# EAGLE board InstantPizza (EAGLE 6.5.0)
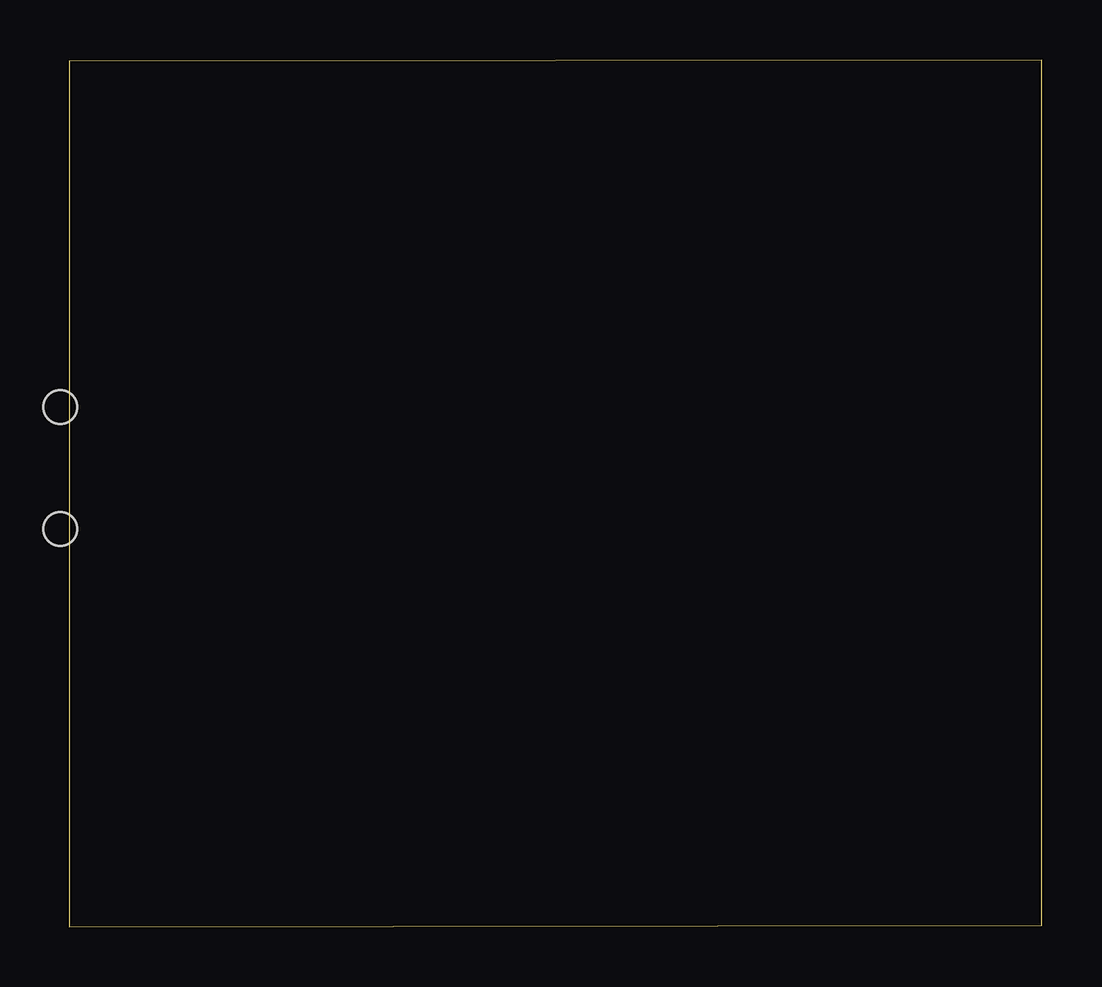
[diagram p0: board, top side]
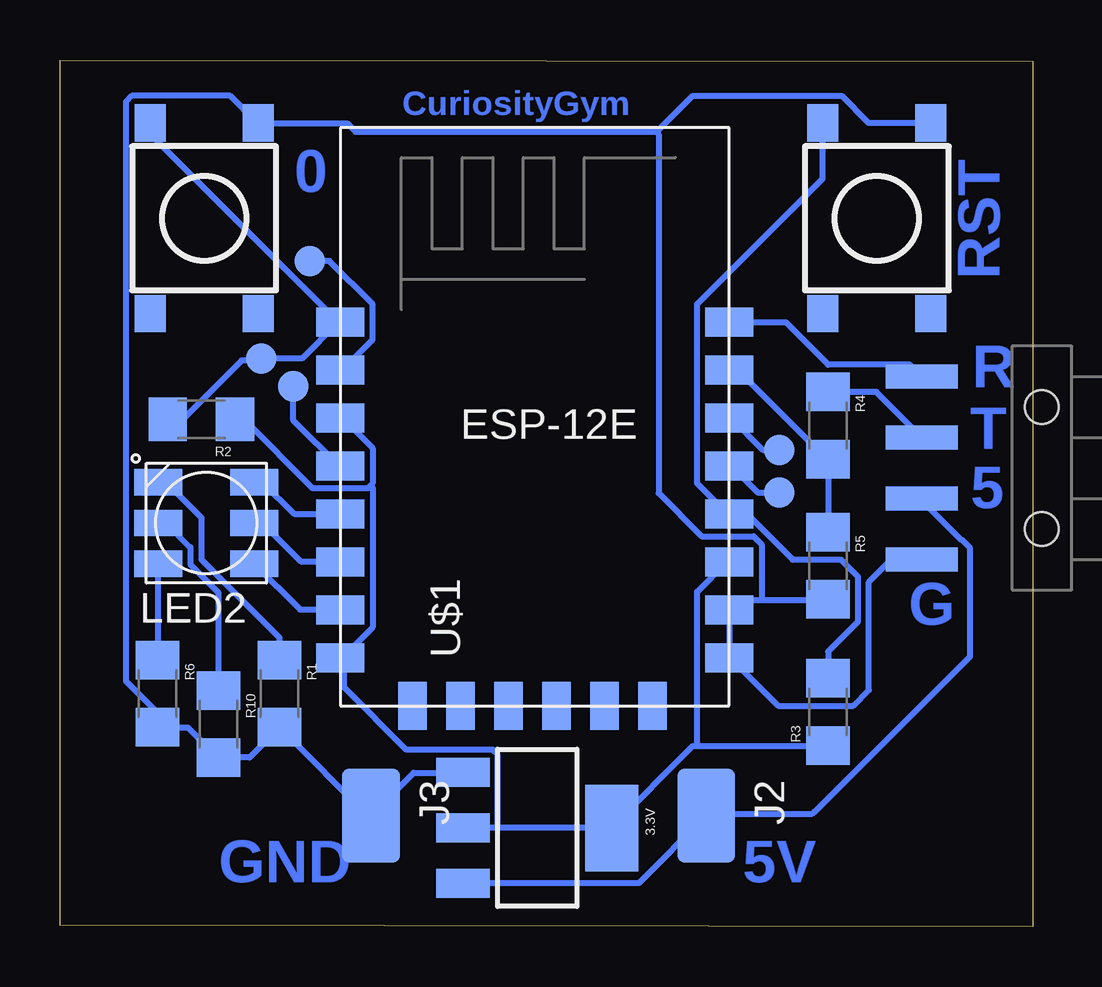
[diagram p1: board, bottom side, seen from below]

Size 40.53 x 36.13 mm. Coordinates in mm from the lower left corner, seen from the top.
Outline: 0,0 40.53,0.06 40.53,36.13 0,36.07 0,0
Copper layers (1*16): Top 0.035mm / dielectric 1.5mm / Bottom 0.035mm
Design rules "default *": minimum track width 10mil, minimum drill 24mil, track to track 8mil, track to pad 8mil, pad to pad 8mil, via to via 8mil, smd to smd 8mil, copper to edge 40mil, drill to drill 8mil, minimum pad ring 10mil, minimum via ring 8mil, stop-mask expansion 4mil, vias tented up to drill 0mil, thermal gap 10mil

## Footprints (pad centres in the part's own frame; a part is rotated, then mirrored left to right if it is on the bottom)
SOT223 = smd 1.219 x 2.235: 1 -2.311,-3.099; 2 0,-3.099; 3 2.311,-3.099 | smd 3.6 x 2.2: 4 0,3.099
1X04-SMD = smd 1 x 3: 1 -3.81,5; 2 -1.27,5; 3 1.27,5; 4 3.81,5 | hole 1.4: -2.54,0; 2.54,0
LUXEON-PAD = smd 3.9 x 2.4: P$1 0,0
RGBLED5050 = smd 2 x 1.1: 1 -2,1.7; 2 -2,0; 3 -2,-1.7; 4 2,-1.7; 5 2,0; 6 2,1.7
1206 = smd 1.6 x 1.8: 1 -1.4,0; 2 1.4,0
TACTILE_SWITCH_TALL = smd 1.55 x 1.3: A1 -3.975,-2.25; A2 3.975,-2.25; B1 -3.975,2.25; B2 3.975,2.25
PAD.03X.05 = smd 1.27 x 1.27: P$1 0,0
ESP8266-ESP12E = smd 2 x 1.2: 1 0,16; 2 0,14; 3 0,12; 4 0,10; 5 0,8; 6 0,6; 7 0,4; 8 0,2; 9 16.2,2; 10 16.2,4; 11 16.2,6; 12 16.2,8; 13 16.2,10; 14 16.2,12; 15 16.2,14; 16 16.2,16 | smd 1.2 x 2: 17 11,0; 18 3,0; 19 5,0; 20 13,0; 21 7,0; 22 9,0

## Placement (x,y rotation side)
3.3V  [SOT223]  20.64,4.11 270 bottom
J1  [1X04-SMD]  -0.39,19.11 90 bottom
J2  [LUXEON-PAD]  13.6,4.63 270 bottom
J3  [LUXEON-PAD]  27.57,4.63 270 bottom
LED2  RGBLED5050  [RGBLED5050]  34.43,16.82 180 bottom
R1  10k  [1206]  31.38,9.71 270 bottom
R2  10k  [1206]  34.64,21.15 180 bottom
R3  10k  [1206]  8.52,8.95 90 bottom
R4  10k  [1206]  8.52,20.89 270 bottom
R5  20k  [1206]  8.52,15.05 270 bottom
R6  10k  [1206]  36.46,9.71 270 bottom
R10  10k  [1206]  33.92,8.44 270 bottom
S1  SWITCH-MOMENTARY-2SMD-4  [TACTILE_SWITCH_TALL]  34.52,29.52 90 bottom
S2  SWITCH-MOMENTARY-2SMD-4  [TACTILE_SWITCH_TALL]  6.49,29.52 90 bottom
TP2  TEST-POINT3X5  [PAD.03X.05]  32.14,23.68 0 bottom
TP3  TEST-POINT3X5  [PAD.03X.05]  30.82,22.52 0 bottom
TP4  TEST-POINT3X5  [PAD.03X.05]  10.55,19.87 0 bottom
TP5  TEST-POINT3X5  [PAD.03X.05]  30.11,27.75 0 bottom
TP6  TEST-POINT3X5  [PAD.03X.05]  10.55,18.09 0 bottom
U$1  [ESP8266-ESP12E]  28.84,9.2 0 bottom

## Library data of the parts
3.3V = SparkFun-PowerIC; PROD_ID: VREG-08170
J1-J3 = SparkFun-Connectors
LED2 = adafruit
R1-R6 R10 TP2-TP6 = SparkFun-Passives
S1 S2 = SparkFun-Electromechanical; PROD_ID: SWCH-11966
U$1 = esp826612e

## Nets
3.3: 3.3V.2 3.3V.4 R2.1 R3.1 U$1.3 U$1.8 U$1.11
5V: 3.3V.3 J1.2 J2.P$1
ADC: TP5.P$1 U$1.2
BLUE: LED2.3 U$1.5
GND: 3.3V.1 J1.1 J3.P$1 R1.2 R5.2 R6.2 R10.2 S1.A2 S2.A2 U$1.9 U$1.10
GPIO0: R3.2 S2.B2 U$1.12
GPIO5: TP4.P$1 U$1.14
GPIO16: TP3.P$1 U$1.4
GREEN: LED2.1 U$1.7
N$1: TP6.P$1 U$1.13
N$2: LED2.6 R6.1
N$5: LED2.4 R1.1
N$6: LED2.5 R10.1
RED: LED2.2 U$1.6
RST: R2.2 S1.B2 TP2.P$1 U$1.1
RXD_5: J1.4 U$1.16
RXD_ESP: R4.2 R5.1 U$1.15
TXD_5: J1.3 R4.1

## Tracks (layer width: path | path; a pad name or v marks a point on that pad's centre or on a via)
3.3
  Bottom 0.254: 27.59,18.39 27.5,18.47 27.5,19.95 28.74,21.19 U$1.3 | 27.59,18.39 27.7,18.27 29.99,18.27 32.86,21.14 R2.1 | 27.59,18.39 27.5,18.3 27.5,12.48 28.77,11.21 U$1.8 28.69,11.11 28.69,9.97 26.1,7.37 22.49,7.37 22.29,7.17 22.29,4.12 | 13.98,7.53 14.16,7.53 17.56,4.12 3.3V.4 17.69,4.12 22.29,4.12 | 13.98,7.53 8.52,7.53 R3.1 | 13.98,7.53 13.98,13.95 12.74,15.2 12.66,15.2 U$1.11 | 22.29,4.12 3.3V.2
5V
  Bottom 0.254: 3.3V.3 16.42,1.81 J2.P$1 13.5,4.71 9.18,4.71 9.08,4.78 2.6,11.26 2.6,15.78 2.96,16.14 2.99,16.14 4.53,17.69 J1.2 4.64,17.84 4.64,17.76
ADC
  Bottom 0.254: TP5.P$1 29.3,27.75 27.5,25.94 27.5,24.47 28.74,23.22 28.84,23.22 U$1.2
BLUE
  Bottom 0.254: U$1.5 30.77,17.2 32.07,18.5 32.42,18.5 LED2.3
GND
  Bottom 0.254: 3.3V.1 23.76,6.41 25.79,6.41 J3.P$1 27.67,4.61 31.28,8.21 R1.2 31.38,8.29 32.63,7.04 R10.2 34.02,7.12 35.19,8.29 36.46,8.29 R6.2 36.51,8.42 36.51,8.97 37.78,10.24 37.78,34.37 37.53,34.63 33.44,34.63 32.37,33.56 S1.A2 32.25,33.49 28.56,33.49 28.21,33.13 15.66,33.13 | 11.29,13.62 12.23,13.62 12.64,13.22 U$1.10 12.64,13.09 U$1.9 12.54,11.13 10.61,9.2 7.48,9.2 6.82,9.86 6.82,14.36 5.88,15.3 4.64,15.3 J1.1 | 11.29,13.62 8.52,13.62 R5.2 | 15.66,33.13 14.16,34.63 7.96,34.63 6.85,33.51 4.26,33.51 S2.A2 | 11.29,13.62 11.29,15.93 11.62,16.26 13.78,16.26 15.58,18.07 15.58,33.03 15.66,33.13
GPIO0
  Bottom 0.254: S2.B2 8.75,31.17 13.98,25.94 13.98,18.47 12.71,17.2 12.66,17.2 U$1.12 12.54,17.15 11.85,17.15 10,15.3 7.99,15.3 7.28,14.59 7.28,12.71 8.52,11.46 R3.2
GPIO5
  Bottom 0.254: TP4.P$1 11.24,19.87 12.56,21.19 U$1.14
GPIO16
  Bottom 0.254: TP3.P$1 30.8,22.51 30.8,21.09 28.92,19.21 U$1.4
GREEN
  Bottom 0.254: U$1.7 28.84,13.22 30.52,13.22 LED2.1
N$1
  Bottom 0.254: TP6.P$1 11.44,18.09 12.54,19.19 12.64,19.19 U$1.13
N$2
  Bottom 0.254: R6.1 36.46,15.1 LED2.6
N$5
  Bottom 0.254: R1.1 31.38,12.05 34.63,15.3 34.63,17.05 36.08,18.5 36.41,18.5 LED2.4
N$6
  Bottom 0.254: R10.1 33.92,13.93 35.09,15.1 35.09,15.81 36.11,16.82 LED2.5
RED
  Bottom 0.254: LED2.2 32.09,16.82 30.49,15.22 28.84,15.22 U$1.6
RST
  Bottom 0.254: S1.B2 36.77,33.03 29.02,25.28 U$1.1 28.84,25.18 28.94,25.18 30.44,23.68 TP2.P$1 32.25,23.61 32.96,23.61 35.4,21.17 36.03,21.17 R2.2
RXD_5
  Bottom 0.254: U$1.16 12.64,25.18 10.28,25.18 8.52,23.43 5.12,23.43 4.64,22.94 J1.4
RXD_ESP
  Bottom 0.254: R5.1 R4.2 8.62,19.54 12.28,23.2 U$1.15
TXD_5
  Bottom 0.254: R4.1 6.52,22.28 4.64,20.4 J1.3

## Text on the board
Bottom: CuriosityGym | RST | 0 | R | T | 5 | G | 5V | GND